# Altium PCB PCB1.PcbDoc
Units mm, origin at the board's own origin, x right, y up, seen from the top; angles counter-clockwise.
Board outline 80.14 x 99.59 mm, 2 copper layers (Top Layer, Bottom Layer); 42 components, 19 nets, 188 pads, 28 vias.
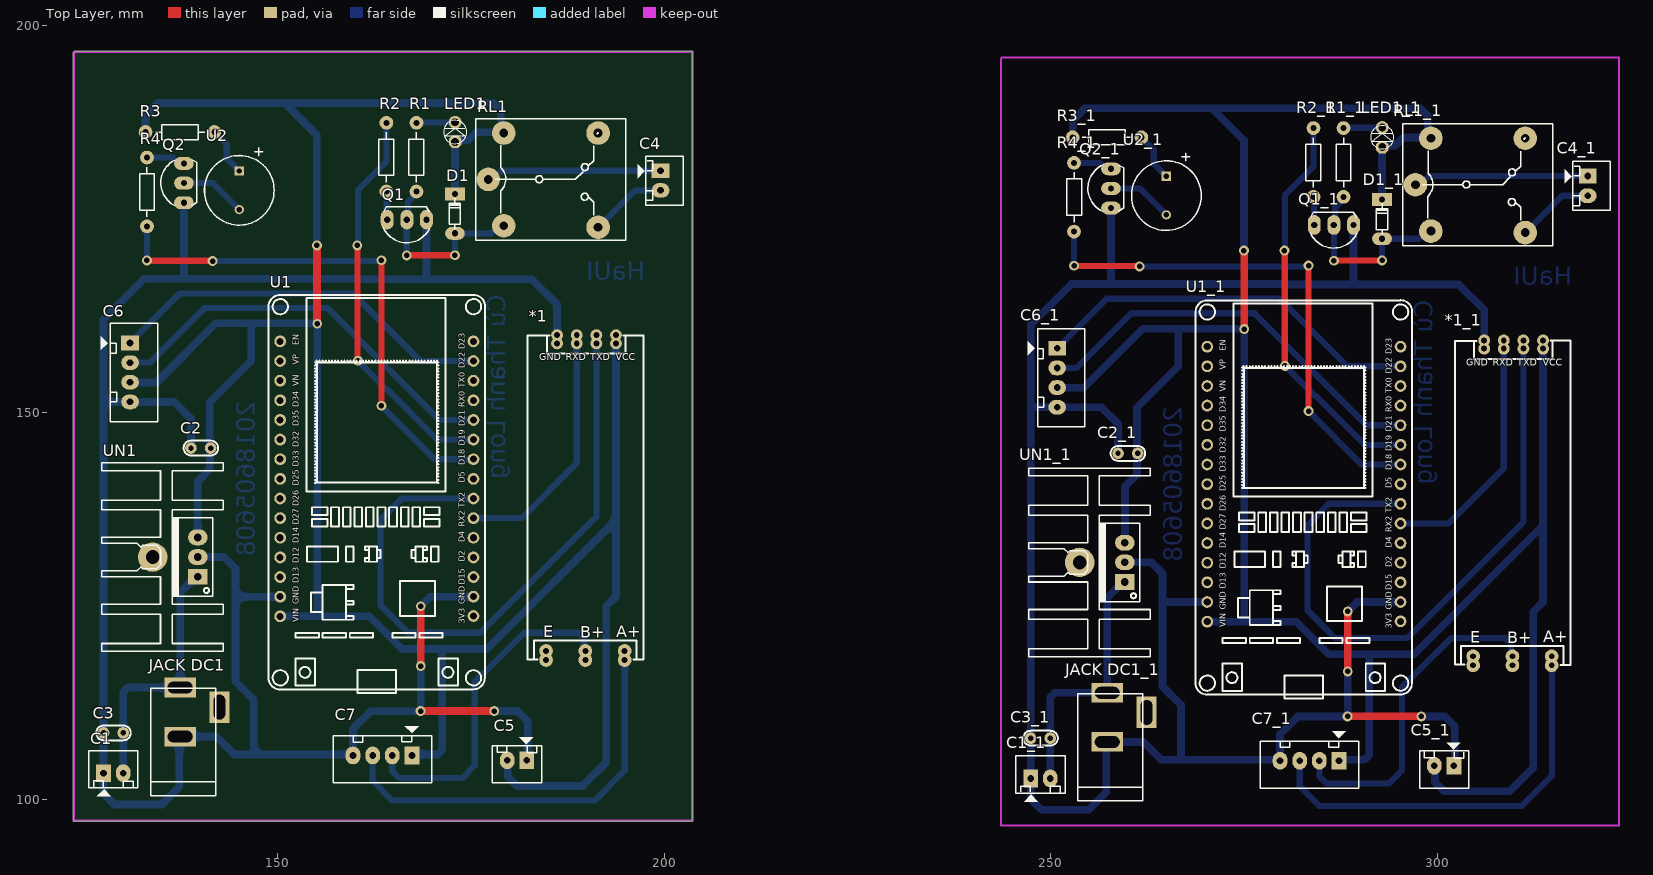
[diagram p0: Top Layer view]
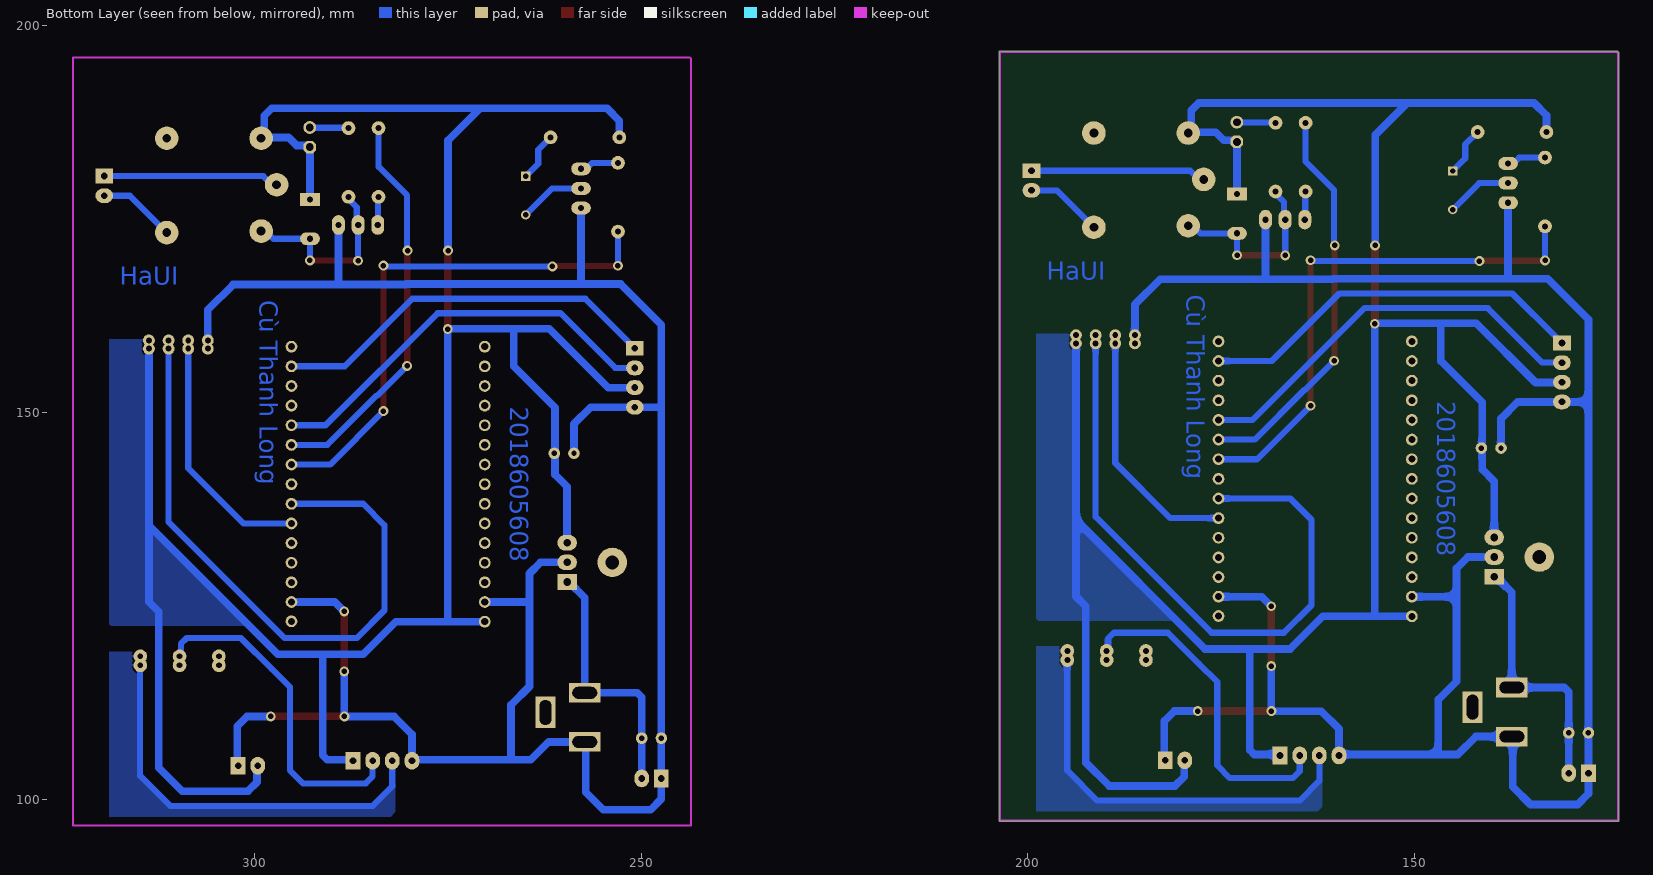
[diagram p1: Bottom Layer view, seen from below]

## Layer stack, top to bottom
Top Solder: solder mask 0.0102, Solder Resist, Dk 3.5
Top Layer: signal copper 0.0356
Dielectric 1: dielectric 0.32, FR-4, Dk 4.8
Bottom Layer: signal copper 0.0356
Bottom Solder: solder mask 0.0102, Solder Resist, Dk 3.5

## Board outline
123.571,97.282 ccw(c123.698,97.282) 123.698,97.155 203.581,97.155 ccw(c203.581,97.282) 203.708,97.282 203.708,196.621 ccw(c203.581,196.621) 203.581,196.749 123.825,196.749 ccw(c123.825,196.621) 123.734,196.711 123.608,196.584 ccw(c123.697,196.495) 123.571,196.494

## Design rules (kind name [scope] priority, off if disabled: settings)
Clearance [All] p1: gap=1 ignorepadtopadclearanceinfootprint=FALSE
PolygonConnect [All] p1: connectstyle=Relief reliefconductorwidth=0.254 reliefentries=4 polygonreliefangle="90 Angle" airgapwidth=0.254
RoutingVias [All] p1: holewidth=0.711 width=1.27 viastyle="Through Hole" minholewidth=0.711 minwidth=1.27 maxholewidth=0.711 maxwidth=1.27
SolderMaskExpansion [All] p1: expansion=0.102 istentingtop=FALSE
Width VCC5 [InNet('VCC5')] p1: maxlimit=1 minlimit=1 preferedwidth=1
Width VCC_IN [InNet('VCC_IN')] p2: maxlimit=1 minlimit=1 preferedwidth=1
Width VCC33 [InNet('VCC5')] p3: maxlimit=1 minlimit=1 preferedwidth=1
Width GND [InNet('GND')] p4: maxlimit=1 minlimit=1 preferedwidth=1
Width [All] p5: maxlimit=0.8 minlimit=0.8 preferedwidth=0.8
30 further rules are at their usual default settings.

## Classes and differential pairs
component class Sheet1: *1 C1 C2 C3 C7 D1 "JACK DC1" LED1 Q1 Q2 R1 R2 R3 R4 RL1 U1 U2 UN1

## Components (designator, comment, footprint, x,y, rotation, side; value= is the part's Value field where it differs from the comment)
*1 "TTL_RS485" "RS-485 Module" 189.497,136.906 r270 top
*1_1 "TTL_RS485" "RS-485 Module" 309.385,136.22 r270 top (schematic designator *1)
C1 "Header2" Header2 127.508,103.378 r0 top
C1_1 "Header2" Header2 247.396,102.692 r0 top (schematic designator C1)
C2 "104" "tu gom" 140.081,145.415 r180 top
C2_1 "104" "tu gom" 259.969,144.729 r180 top (schematic designator C2)
C3 "104" "tu gom" 128.778,108.585 r180 top
C3_1 "104" "tu gom" 248.666,107.899 r180 top (schematic designator C3)
C4 "Header2" Header2 199.542,181.28 r270 top
C4_1 "Header2" Header2 319.43,180.594 r270 top (schematic designator C4)
C5 "Header2" Header2 182.245,105.029 r180 top
C5_1 "Header2" Header2 302.133,104.343 r180 top (schematic designator C5)
C6 "LCD_I2C" Header4 130.937,159.004 r270 top
C6_1 "LCD_I2C" Header4 250.825,158.318 r270 top (schematic designator C6)
C7 "LCD_I2C" Header4 167.386,105.664 r180 top
C7_1 "LCD_I2C" Header4 287.274,104.978 r180 top (schematic designator C7)
D1 "100v" "DIODE 0.5A" 172.949,175.717 r270 top
D1_1 "100v" "DIODE 0.5A" 292.837,175.031 r270 top (schematic designator D1)
"JACK DC1" "JACK DC 5.5" "JACK DC 5.5" 139.954,111.277 r90 top value="Jac DC"
"JACK DC1_1" "JACK DC 5.5" "JACK DC 5.5" 259.842,110.592 r90 top value="Jac DC" (schematic designator "JACK DC1")
LED1 "LED 3mm" LED-3MM-BLUE 172.974,186.413 r90 top
LED1_1 "LED 3mm" LED-3MM-BLUE 292.862,185.727 r90 top (schematic designator LED1)
Q1 "C1815" C1815_cam 166.726,174.955 r180 top
Q1_1 "C1815" C1815_cam 286.614,174.269 r180 top (schematic designator Q1)
Q2 "C1815" C1815_cam 137.897,179.68 r90 top
Q2_1 "C1815" C1815_cam 257.785,178.994 r90 top (schematic designator Q2)
R1 "510R" R1/4W 167.97,187.477 r270 top value="R1/4W - 1K"
R1_1 "510R" R1/4W 287.858,186.792 r270 top value="R1/4W - 1K" (schematic designator R1)
R2 "510R" R1/4W 164.084,187.477 r270 top value="R1/4W - 1K"
R2_1 "510R" R1/4W 283.972,186.792 r270 top value="R1/4W - 1K" (schematic designator R2)
R3 "510R" R1/4W 132.944,186.284 r0 top value="R1/4W - 1K"
R3_1 "510R" R1/4W 252.832,185.598 r0 top value="R1/4W - 1K" (schematic designator R3)
R4 "510R" R1/4W 133.121,174.092 r90 top value="R1/4W - 1K"
R4_1 "510R" R1/4W 253.009,173.406 r90 top value="R1/4W - 1K" (schematic designator R4)
RL1 "Relay" RELAY_SRA_05VDC_SL_C 177.265,180.157 r0 top
RL1_1 "Relay" RELAY_SRA_05VDC_SL_C 297.153,179.471 r0 top (schematic designator RL1)
U1 "ESP32_MODULE copy" ESP32-WIFIMODULE-FOOTPRINT 164.973,139.7 r0 top
U1_1 "ESP32_MODULE copy" ESP32-WIFIMODULE-FOOTPRINT 284.861,139.014 r0 top (schematic designator U1)
U2 "BUZZ" BUZZER_D9_TH 145.059,177.749 r270 top
U2_1 "BUZZ" BUZZER_D9_TH 264.947,177.063 r270 top (schematic designator U2)
UN1 "L78M05CP" QTO-220H2 139.7,131.318 r90 top
UN1_1 "L78M05CP" QTO-220H2 259.588,130.632 r90 top (schematic designator UN1)

## Footprints (in the part's own frame and the unit in brackets; to place one, negate y for a bottom-side part, rotate by r counter-clockwise, add the part's x,y. Pads: shape width x height; smd on the part's side, far side on the other; paste and mask are expansions set on the pad)
BUZZER_D9_TH [mm]
  rect 1.2x1.2 hole 0.7: 1(-3.5,0)
  round 1.2 hole 0.7: 2(1.5,0)
  silkscreen extent -6.5,-4.5 3.5,4.5, body extent -5.5,-4.5 3.5,4.5, height 5.5
C1815_cam [mil]
  oval 66x100 hole 32: 1(-100,0) 2(0,0) 3(100,0)
  silkscreen extent -117,-65 120,118, body extent -109,-66 109,95, height 245
"DIODE 0.5A" [mil] "Diode muoi, xung"
  oval 65x100 hole 32: 1(100,0)
  rect 65x100 hole 32: 2(-100,0)
  silkscreen extent -80,-30 80,28, body extent -108,-33 108,32, height 61
ESP32-WIFIMODULE-FOOTPRINT [mil]
  round 60 hole 36: 1(-575.9,768.25) 2(-575.9,668.25) 3(-575.9,568.25) 4(-575.9,468.25) 5(-575.9,368.25) 6(-575.9,268.25) 7(-575.9,168.25) 8(-575.9,68.25) 9(-575.9,-31.75) 10(-575.9,-131.75) 11(-575.9,-231.75) 12(-575.9,-331.75) 13(-575.9,-431.75) 14(-575.9,-531.75) 15(-575.9,-631.75) 16(408.35,-630.18) 17(408.35,-531.75) 18(408.35,-431.75) 19(408.35,-331.75) 20(408.35,-231.75) 21(408.35,-131.75) 22(408.35,-31.75) 23(408.35,68.25) 24(408.35,168.25) 25(408.35,268.25) 26(408.35,368.25) 27(408.35,468.25) 28(408.35,568.25) 29(408.35,668.25) 30(408.35,768.25)
  silkscreen extent -635,-1023 468,1005
Header2 [mil] "CON2"
  rect 75x90 hole 34: 1(0,0)
  oval 75x90 hole 34: 2(100,0)
  silkscreen extent -75,-118 175,115, body extent -68,-70 168,107, height 236
Header4 [mil] "CON4"
  rect 75x90 hole 34: 1(0,0)
  oval 75x90 hole 34: 2(100,0) 3(200,0) 4(300,0)
  silkscreen extent -100,-150 400,140, body extent -90,-90 398,136, height 276
"JACK DC 5.5" [mm] "Jac DC input"
  rect 2.54x4.064 hole 1.5 slot 3.2 at 90 deg: 1(3.175,2.54) 2(-3.175,2.54)
  rect 4.064x2.54 hole 1.5 slot 3.2 at 0 deg: 3(0.635,-2.54)
  silkscreen extent -10.79,-2.03 3.05,6.35, body extent -10.42,-2.67 3.4,6.84, height 11.02
LED-3MM-BLUE [mil]
  oct 65x65 hole 40: 1(-55,0)
  round 65 hole 40: 2(45,0)
  silkscreen extent -64,-59 54,59, body extent -72,-65 54,65, height 184
QTO-220H2 [mil] "TO-220 - 1-2-3"
  round 150 hole 70: 0(0,230)
  rect 80x100 hole 39: 1(-100,0)
  oval 80x100 hole 39: 2(0,0) 3(100,0)
  silkscreen extent -480,-130 480,490, body extent -449,-177 453,469, height 1206
R1/4W [mil]
  round 70 hole 31: 1(0,0) 2(350,0)
  silkscreen extent 48,-38 302,38, body extent -40,-47 386,47, height 111
RELAY_SRA_05VDC_SL_C [mil] "Relay SPDT, 5 pin, 10A,W 650mil, L 800mil, H 800mil"
  round 120 hole 45: 1(559.06,-243.78) 2(559.06,236.22) 3(78.74,236.22) 4(0,0) 5(78.74,-236.22)
  silkscreen extent -63,-311 700,310, body extent -55,-306 697,304, height 602
"RS-485 Module" [mil] "RS-485 TTL Module"
  round 60 hole 30: 1(-910,168.5) 1(-868,168.5) 2(-910,68.5) 2(-868,68.5) 3(-910,-31.5) 3(-868,-31.5) 4(-910,-131.5) 4(-868,-131.5)
  round 70 hole 30: 5(698,-187.5) 5(744,-187.5) 6(698,12.5) 6(744,12.5) 7(698,212.5) 7(744,212.5)
  silkscreen extent -909,-281 742,308, body extent -949,-282 808,310, height 110
"tu gom" [mm] "Tu gom mini"
  round 1.5 hole 0.7: 1(-1.27,0) 2(1.27,0)
  silkscreen extent -2.25,-0.97 2.22,0.97, body extent -2.92,-0.85 2.92,0.85, height 6.12

## Part data
C1 C1_1 C4 C4_1 C5 C5_1: "Header IDC, 2 x 1 Pin Vertical 2.54mm Pitch (Non-Boxed, Male)", Manufacturer="W¨¹rth Elektronik eiSos GmbH", partNo=613002143121, ComponentLink1 Description=Manufacturer, ComponentLink1URL=http://www.we-online.com, ComponentLink2 Description=Datasheet, ComponentLink2URL=http://katalog.we-online.de/em/datasheet/6130xx143121.pdf, Created by="Karrer Zheng", Created Date="29 March 2013", NoPins=02
C2 C2_1 C3 C3_1: library part "Tu gom 104 50V", "Cắm", Chung_Loai=Cắm, Don_Vi=Con, Ma_Hang=MH004761, So_Chan=2, Ten_Linh_Kien="Tụ gốm 104 100nF 50V"
C6 C6_1 C7 C7_1: library part Header4, "Header IDC, 4 x 1 Pin Vertical 2.54mm Pitch (Non-Boxed, Male)", Manufacturer="W¨¹rth Elektronik eiSos GmbH", partNo=613002143121, ComponentLink1 Description=Manufacturer, ComponentLink1URL=http://www.we-online.com, ComponentLink2 Description=Datasheet, ComponentLink2URL=http://katalog.we-online.de/em/datasheet/6130xx143121.pdf, Created by="Karrer Zheng", Created Date="29 March 2013", NoPins=02
D1 D1_1: library part "Diode 1N4148", "Cắm", Chung_Loai=Cắm, Don_Vi=Con, Ma_Hang=MH001065, Ten_Linh_Kien="Diode 1N4148 DO35 450mA 100V ( 1N4148 DIP)"
LED1 LED1_1: library part "LED 3mm Xanh Duong", "Cắm", Chung_Loai=Cắm, Don_Vi=Con, Ma_Hang=MH009003, Ten_Linh_Kien="LED 3MM Xanh Dương SS (1000c)"
Q1 Q1_1 Q2 Q2_1: "NPN 600mW, ECB"
R1 R1_1 R2 R2_1 R3 R3_1 R4 R4_1: library part R1/4W, "Resistor 1/4W"
RL1 RL1_1: library part RL_SRA-05VDC-SL-C, "Relay 5 Chan", Ma_Hang=MH009374, Ten="Relay 5V10A SRD-05VDC-SL-C Chính Hãng"
U2 U2_1: library part Speaker, "Loudspeaker"
UN1 UN1_1: "Positive Voltage Regulator", ComponentLink1Description="Manufacturer Link", ComponentLink1URL=http://www.st.com/, ComponentLink2Description=Datasheet, ComponentLink2URL=http://www.st.com/stonline/products/literature/ds/2146/l78m05c.pdf, DatasheetVersion=Apr-1994, LatestRevisionDate=17-Jul-2002, LatestRevisionNote="Re-released for DXP Platform.", Note="Tab is connected to pin 3 (GND).", PackageDescription="TO, Thru-Hole, Vertical, Heatsink Mounted; 3 In-Line Leads; Pitch 2.54 mm; Pin sequence 1, 3, 2", PackageReference=ISOWATT220AB, PackageVersion=Jul-1998, Published=24-Aug-2001, Publisher="Altium Limited"

## Via types
v1: diameter 1.27, hole 0.711, Top Layer to Bottom Layer, 28 vias

## Nets (pads, with @x,y where several pads share a name; then routed paths per layer and width w, separated by ;. In a path a pad name is that pad's centre, name@x,y a point inside that pad or via, vN(x,y) a via of type N, cw(c..) or ccw(c..) an arc to the next point about the centre after c; other vN are vias at no path point)
GND: "JACK DC1.2" *1.4 C1.1 C2.2 C3.2 C5.1 C6.4 C7.4 Q1.1 Q2.1 U1.14 U1.17 UN1.2 | length 292.2
  Top Layer w1: v1(168.503,111.405) 168.506,111.402 178.031,111.402 v1(178.033,111.4) ; v1(168.529,117.221) v1(168.529,124.968)
  Bottom Layer w1: Q2.1 137.897,167.305 ; C2.2 138.811,149.225 136.652,151.384 C6.4 127.508,151.384 ; UN1.2 143.129,131.318 144.562,129.885 144.562,126.194 ; 146.939,105.791 159.639,105.791 C7.4 159.766,109.093 162.052,111.379 168.477,111.379 v1(168.503,111.405) 168.529,111.431 v1(168.529,117.221) ; U1.14 144.562,126.194 ; v1(168.529,124.968) 169.755,126.194 U1.17 ; Q1.1 169.266,167.246 ; v1(178.033,111.4) 181.081,111.4 182.372,110.109 182.372,105.156 C5.1 ; *1.4@186.157,160.02 186.157,163.982 182.893,167.246 169.266,167.246 ; 127.508,151.384 127.508,162.052 132.761,167.305 137.897,167.305 ; 127.508,151.384 C3.2 C1.1 127.508,100.711 128.905,99.314 135.001,99.314 137.287,101.6 137.287,107.975 137.414,108.102 142.088,108.102 144.407,105.783 146.939,105.783 146.939,112.891 144.562,115.268 144.562,126.194 ; 137.897,167.305 160.502,167.305 160.561,167.246 169.266,167.246
NetC4_1: C4.1 RL1.4 | length 22.7
  Bottom Layer w0.8: RL1.4 177.874,180.157 178.997,181.28 C4.1
NetC4_2: C4.2 RL1.1 | length 10.1
  Bottom Layer w0.8: RL1.1 196.24,178.74 C4.2
NetD1_1: D1.1 Q1.2 R1.2 RL1.5 | length 24.5
  Top Layer w0.8: v1(166.726,170.332) 166.738,170.345 172.936,170.345 v1(172.949,170.358)
  Bottom Layer w0.8: v1(166.726,170.332) Q1.2 166.893,175.123 166.893,177.246 167.97,178.323 R1.2 ; v1(172.949,170.358) D1.1 177.677,173.177 178.657,174.157 RL1.5
NetLED1_2: LED1.2 R1.1 | length 5
  Bottom Layer w0.8: R1.1 168.01,187.517 172.935,187.517 LED1.2
NetQ1_3: Q1.3 R2.2 | length 3.7
  Bottom Layer w0.8: R2.2 164.135,178.537 164.135,175.006 Q1.3
NetQ2_2: Q2.2 U2.2 | length 8.6
  Bottom Layer w0.8: Q2.2 141.629,179.68 U2.2
NetQ2_3: Q2.3 R4.2 | length 5.1
  Bottom Layer w0.8: R4.2 136.466,182.982 137.228,182.22 Q2.3
NetR3_2: R3.2 U2.1 | length 6.4
  Bottom Layer w0.8: R3.2 143.44,184.677 143.44,182.869 U2.1
OUT_BUZ: R4.1 U1.24 | length 68.4
  Top Layer w0.8: v1(133.121,169.672) 133.16,169.634 141.567,169.634 v1(141.605,169.596) ; v1(163.449,150.876) v1(163.449,169.697)
  Bottom Layer w0.8: v1(133.121,169.672) R4.1 ; v1(141.605,169.596) 163.22,169.596 163.322,169.697 v1(163.449,169.697) ; v1(163.449,150.876) 170.351,143.974 U1.24
OUT_RL1: R2.1 U1.25 | length 51.5
  Top Layer w0.8: v1(160.325,171.631) 160.363,171.593 160.363,156.756 v1(160.401,156.718)
  Bottom Layer w0.8: v1(160.325,171.631) 160.401,171.707 160.401,178.773 164.084,182.456 R2.1 ; v1(160.401,156.718) 164.208,152.911 164.292,152.911 170.689,146.514 U1.25
RS485_A+: *1.7 C7.3 | length 52.9
  Bottom Layer w0.8: C7.3 162.306,102.362 164.841,99.827 191.013,99.827 194.92,103.734 194.92,117.983 *1.7@194.894,118.008
RS485_B-: *1.6 C7.2 | length 45
  Bottom Layer w0.8: C7.2@164.846,106.254 164.846,103.632 165.735,102.743 173.863,102.743 175.514,104.394 175.514,115.185 177.872,117.544 177.889,117.544 181.884,121.539 188.874,121.539 189.645,120.768 189.645,119.346 189.814,119.177 *1.6@189.814,118.008
RX2: *1.3 U1.21 | length 31.8
  Bottom Layer w0.8: U1.21 181.566,136.354 188.697,143.485 *1.3@188.697,158.953
SCL: C6.1 U1.29 | length 50.8
  Bottom Layer w0.8: C6.1 131.127,159.004 131.68,159.556 131.68,159.747 137.338,165.405 159.715,165.405 168.446,156.674 U1.29
SDA: C6.2 U1.26 | length 53.3
  Bottom Layer w0.8: C6.2 133.477,156.464 140.538,163.525 152.842,163.525 152.863,163.546 156.451,163.546 170.943,149.054 U1.26
TX2: *1.2 U1.22 | length 82.2
  Bottom Layer w0.8: U1.22 166.072,138.894 163.322,136.144 163.322,125.095 166.886,121.531 176.241,121.531 191.237,136.528 *1.2@191.237,158.953
VCC5: *1.1 C2.1 C5.2 C6.3 C7.1 D1.2 LED1.1 R3.1 RL1.3 U1.15 UN1.3 | length 332.6
  Top Layer w1: v1(155.092,171.631) 155.118,171.605 155.118,161.519 v1(155.143,161.493)
  Bottom Layer w1: C6.3 130.968,153.893 134.36,153.893 142.011,161.544 146.612,161.544 ; R3.1 132.944,188.443 134.544,190.043 150.952,190.043 ; UN1.3 139.7,141.097 141.255,142.652 141.255,145.319 C2.1 141.255,145.511 141.255,151.327 146.612,156.684 146.612,161.544 ; U1.15 155.143,123.654 ; v1(155.092,171.631) 155.092,185.903 150.952,190.043 ; C7.1 167.711,105.664 167.838,105.791 170.727,105.791 171.313,106.377 171.313,119.327 171.196,119.444 ; D1.2 172.961,178.27 172.961,185.003 LED1.1 173.18,185.222 174.681,185.222 175.717,186.258 RL1.3@179.164,186.258 ; RL1.3 RL1.3@179.164,186.258 ; C5.2 179.792,104.942 179.792,102.91 180.975,101.727 189.484,101.727 192.505,104.748 192.505,124.941 193.777,126.213 193.777,136.119 ; *1.1@193.777,158.953 193.777,136.119 ; 146.612,161.544 155.092,161.544 v1(155.143,161.493) 155.143,123.654 ; 150.952,190.043 177.902,190.043 178.873,189.071 178.873,186.548 RL1.3@179.164,186.258 ; 155.143,123.654 161.842,123.654 166.053,119.444 171.196,119.444 ; 171.196,119.444 177.102,119.444 193.777,136.119
VCC_IN: "JACK DC1.1" C1.2 C3.1 UN1.1 | length 33
  Bottom Layer w1: C1.2 C3.1@130.048,108.107 ; C3.1 130.048,113.867 130.634,114.452 137.414,114.452 137.414,126.746 139.446,128.778 UN1.1
pads on no net: "JACK DC1.3" "JACK DC1_1.1" "JACK DC1_1.2" "JACK DC1_1.3" *1.5 *1_1.1 *1_1.2 *1_1.3 *1_1.4 *1_1.5 *1_1.6 *1_1.7 C1_1.1 C1_1.2 C2_1.1 C2_1.2 C3_1.1 C3_1.2 C4_1.1 C4_1.2 C5_1.1 C5_1.2 C6_1.1 C6_1.2 C6_1.3 C6_1.4 C7_1.1 C7_1.2 C7_1.3 C7_1.4 D1_1.1 D1_1.2 LED1_1.1 LED1_1.2 Q1_1.1 Q1_1.2 Q1_1.3 Q2_1.1 Q2_1.2 Q2_1.3 R1_1.1 R1_1.2 R2_1.1 R2_1.2 R3_1.1 R3_1.2 R4_1.1 R4_1.2 RL1.2 RL1_1.1 RL1_1.2 RL1_1.3 RL1_1.4 RL1_1.5 U1.1 U1.2 U1.3 U1.4 U1.5 U1.6 U1.7 U1.8 U1.9 U1.10 U1.11 U1.12 U1.13 U1.16 U1.18 U1.19 U1.20 U1.23 U1.27 U1.28 U1.30 U1_1.1 U1_1.2 U1_1.3 U1_1.4 U1_1.5 U1_1.6 U1_1.7 U1_1.8 U1_1.9 U1_1.10 U1_1.11 U1_1.12 U1_1.13 U1_1.14 U1_1.15 U1_1.16 U1_1.17 U1_1.18 U1_1.19 U1_1.20 U1_1.21 U1_1.22 U1_1.23 U1_1.24 U1_1.25 U1_1.26 U1_1.27 U1_1.28 U1_1.29 U1_1.30 U2_1.1 U2_1.2 UN1.0 UN1_1.0 UN1_1.1 UN1_1.2 UN1_1.3
copper on no net: | length 1179.9
  Top Layer w0.8: v1(253.009,168.986) 253.047,168.948 261.455,168.948 v1(261.493,168.91) ; v1(280.213,170.945) 280.251,170.907 280.251,156.07 v1(280.289,156.032) ; v1(283.337,150.19) v1(283.337,169.012) ; v1(286.614,169.647) 286.626,169.659 292.824,169.659 v1(292.837,169.672)
  Top Layer w1: v1(274.98,170.945) 275.006,170.92 275.006,160.833 v1(275.031,160.807) ; v1(288.391,110.719) 288.394,110.717 297.919,110.717 v1(297.921,110.714) ; v1(288.417,116.535) v1(288.417,124.282)
  Bottom Layer w0.8: 250.825,155.778 253.365,155.778 260.426,162.839 272.73,162.839 272.751,162.86 276.339,162.86 290.831,148.368 295.233,148.368 ; 250.825,158.318 251.016,158.318 251.568,158.871 251.568,159.061 257.226,164.719 279.603,164.719 288.334,155.988 295.233,155.988 ; v1(253.009,168.986) 253.009,173.406 ; 253.009,182.296 256.354,182.296 257.116,181.534 257.785,181.534 ; 257.785,178.994 261.517,178.994 264.947,175.563 ; v1(261.493,168.91) 283.108,168.91 283.21,169.012 v1(283.337,169.012) ; 261.722,185.598 263.328,183.991 263.328,182.183 264.947,180.563 ; v1(280.213,170.945) 280.289,171.021 280.289,178.087 283.972,181.77 283.972,186.792 ; v1(280.289,156.032) 284.096,152.225 284.18,152.225 290.577,145.828 295.233,145.828 ; 282.194,104.978 282.194,101.676 284.729,99.141 310.901,99.141 314.808,103.048 314.808,117.297 314.782,117.323 ; v1(283.337,150.19) 290.239,143.288 295.233,143.288 ; 283.972,177.902 284.023,177.851 284.023,174.32 284.074,174.269 ; 284.734,105.568 284.734,102.946 285.623,102.057 293.751,102.057 295.402,103.708 295.402,114.5 297.76,116.858 297.777,116.858 301.772,120.853 308.762,120.853 309.533,120.083 309.533,118.66 309.702,118.491 309.702,117.323 ; v1(286.614,169.647) 286.614,174.269 286.781,174.437 286.781,176.56 287.858,177.637 287.858,177.902 ; 287.858,186.792 287.898,186.831 292.823,186.831 292.862,186.87 ; v1(292.837,169.672) 292.837,172.491 297.565,172.491 298.545,173.471 299.153,173.471 ; 295.233,135.668 301.454,135.668 308.585,142.799 308.585,158.267 ; 295.233,138.208 285.96,138.208 283.21,135.458 283.21,124.409 286.774,120.846 296.129,120.846 311.125,135.842 311.125,158.267 ; 297.153,179.471 297.762,179.471 298.885,180.594 319.43,180.594 ; 311.353,173.279 316.128,178.054 319.43,178.054
  Bottom Layer w1: 249.936,102.692 249.936,107.421 ; 249.936,107.899 249.936,113.181 250.522,113.767 257.302,113.767 257.302,126.06 259.334,128.092 259.588,128.092 ; 250.825,153.238 250.856,153.207 254.248,153.207 261.899,160.858 266.5,160.858 ; 252.832,185.598 252.832,187.757 254.432,189.357 270.84,189.357 ; 257.785,176.454 257.785,166.619 ; 258.699,144.729 258.699,148.539 256.54,150.698 250.825,150.698 247.396,150.698 ; 259.588,130.632 263.017,130.632 264.45,129.2 264.45,125.508 ; 259.588,133.172 259.588,140.411 261.143,141.967 261.143,144.634 261.239,144.729 261.143,144.825 261.143,150.641 266.5,155.998 266.5,160.858 ; 266.827,105.105 279.527,105.105 279.654,104.978 279.654,108.407 281.94,110.693 288.365,110.693 v1(288.391,110.719) 288.417,110.745 v1(288.417,116.535) ; 270.233,122.968 275.031,122.968 ; 270.233,125.508 264.45,125.508 ; v1(274.98,170.945) 274.98,185.217 270.84,189.357 ; 287.274,104.978 287.599,104.978 287.726,105.105 290.615,105.105 291.201,105.691 291.201,118.641 291.084,118.758 ; v1(288.417,124.282) 289.643,125.508 295.233,125.508 ; 289.154,174.269 289.154,166.56 ; 292.837,177.571 292.849,177.584 292.849,184.318 292.862,184.33 293.068,184.536 294.569,184.536 295.605,185.572 299.052,185.572 ; v1(297.921,110.714) 300.969,110.714 302.26,109.423 302.26,104.47 302.133,104.343 ; 299.153,185.471 299.052,185.572 ; 299.593,104.343 299.68,104.256 299.68,102.224 300.863,101.041 309.372,101.041 312.393,104.062 312.393,124.255 313.665,125.527 313.665,135.433 ; 306.045,159.334 306.045,163.297 302.781,166.56 289.154,166.56 ; 313.665,158.267 313.665,135.433 ; 247.396,150.698 247.396,107.899 247.396,102.692 247.396,100.025 248.793,98.628 254.889,98.628 257.175,100.914 257.175,107.29 257.302,107.417 261.976,107.417 264.295,105.097 266.827,105.097 266.827,112.205 264.45,114.582 264.45,125.508 ; 247.396,150.698 247.396,161.366 252.649,166.619 257.785,166.619 ; 257.785,166.619 280.39,166.619 280.449,166.56 289.154,166.56 ; 266.5,160.858 274.98,160.858 v1(275.031,160.807) 275.031,122.968 ; 270.84,189.357 297.79,189.357 298.761,188.385 298.761,185.863 299.052,185.572 ; 275.031,122.968 281.73,122.968 285.941,118.758 291.084,118.758 ; 291.084,118.758 296.99,118.758 313.665,135.433

## Polygon pours and split planes (outlines as drawn)
no net on Bottom Layer "NONET_L02_P006" (solid, pour order 6): 281.788,98.374 282.423,97.739 319.964,97.739 319.964,119.075 315.366,119.075 314.782,118.491 314.808,118.466 314.808,103.048 310.901,99.141 284.729,99.141 281.788,102.083
no net on Bottom Layer "NONET_L02_P005" (solid, pour order 5): 313.665,159.487 319.888,159.487 319.888,123.749 318.567,122.428 305.613,122.428 300.634,122.428 313.639,135.433 313.665,135.433
RS485_A+ on Bottom Layer "RS485_A+_L02_P004" (solid, pour order 4): 161.9,99.06 162.535,98.425 200.076,98.425 200.076,119.761 195.478,119.761 194.894,119.177 194.92,119.151 194.92,103.734 191.013,99.827 164.841,99.827 161.9,102.768
VCC5 on Bottom Layer "VCC5_L02_P002" (solid, pour order 2): 193.777,160.172 200,160.172 200,124.435 198.679,123.114 185.725,123.114 180.746,123.114 193.751,136.119 193.777,136.119

## Keep-outs
Keep-Out Layer:
  lines w0.254: 123.698,97.282 123.698,196.494 123.825,196.621 203.581,196.621 203.581,97.282 123.698,97.282 ; 243.586,96.596 323.469,96.596 323.469,195.936 243.713,195.936 243.586,195.809 243.586,96.596

## Other copper
Bottom Layer:
  text "HaUI" at 197.561,166.414 h4
  text "HaUI" at 317.449,165.729 h4
  text "Cù Thanh Long" at 180.22,165.227 h4 r90
  text "Cù Thanh Long" at 300.108,164.541 h4 r90
  text "2018605608" at 147.805,151.46 h4 r90
  text "2018605608" at 267.693,150.774 h4 r90

## Text inside footprints (layer, text, board x,y; h text height)
*1: Top Overlay "E" at 184.379,120.929 h1.52; Top Overlay "B+" at 189.154,120.853 h1.52; Top Overlay "A+" at 193.827,120.98 h1.52; Top Overlay "GND" at 183.871,156.439 h1.52; Top Overlay "VCC" at 193.751,156.439 h1.52; Top Overlay "TXD" at 190.424,156.439 h1.52; Top Overlay "RXD" at 187.249,156.439 h1.52
*1_1: Top Overlay "RXD" at 307.137,155.753 h1.52; Top Overlay "TXD" at 310.312,155.753 h1.52; Top Overlay "VCC" at 313.639,155.753 h1.52; Top Overlay "GND" at 303.759,155.753 h1.52; Top Overlay "A+" at 313.715,120.294 h1.52; Top Overlay "B+" at 309.042,120.167 h1.52; Top Overlay "E" at 304.267,120.244 h1.52
U1: Top Overlay "VIN" at 152.72,122.913 h0.75 r90; Top Overlay "GND" at 152.72,125.213 h0.75 r90; Top Overlay "D13" at 152.72,127.913 h0.75 r90; Top Overlay "D12" at 152.72,130.513 h0.75 r90; Top Overlay "D14" at 152.72,133.114 h0.75 r90; Top Overlay "D27" at 152.72,135.514 h0.75 r90; Top Overlay "D26" at 152.72,137.913 h0.75 r90; Top Overlay "D25" at 152.72,140.514 h0.75 r90; Top Overlay "D33" at 152.72,143.013 h0.75 r90; Top Overlay "D32" at 152.72,145.514 h0.75 r90; Top Overlay "D35" at 152.72,148.214 h0.75 r90; Top Overlay "D34" at 152.72,150.713 h0.75 r90; Top Overlay "VN" at 152.72,153.413 h0.75 r90; Top Overlay "VP" at 152.72,156.214 h0.75 r90; Top Overlay "EN" at 152.72,158.713 h0.75 r90; Top Overlay "3V3" at 174.22,122.714 h0.75 r90; Top Overlay "GND" at 174.22,125.213 h0.75 r90; Top Overlay "D15" at 174.22,127.714 h0.75 r90; Top Overlay "D2" at 174.22,130.714 h0.75 r90; Top Overlay "D4" at 174.22,133.213 h0.75 r90; Top Overlay "RX2" at 174.22,135.213 h0.75 r90; Top Overlay "TX2" at 174.22,137.714 h0.75 r90; Top Overlay "D5" at 174.22,140.913 h0.75 r90; Top Overlay "D18" at 174.22,143.213 h0.75 r90; Top Overlay "D19" at 174.22,145.713 h0.75 r90; Top Overlay "D21" at 174.22,148.214 h0.75 r90; Top Overlay "RX0" at 174.22,150.713 h0.75 r90; Top Overlay "TX0" at 174.22,153.214 h0.75 r90; Top Overlay "D22" at 174.22,155.713 h0.75 r90; Top Overlay "D23" at 174.22,158.214 h0.75 r90
U1_1: Top Overlay "D23" at 294.108,157.528 h0.75 r90; Top Overlay "D22" at 294.108,155.028 h0.75 r90; Top Overlay "TX0" at 294.108,152.528 h0.75 r90; Top Overlay "RX0" at 294.108,150.028 h0.75 r90; Top Overlay "D21" at 294.108,147.528 h0.75 r90; Top Overlay "D19" at 294.108,145.028 h0.75 r90; Top Overlay "D18" at 294.108,142.528 h0.75 r90; Top Overlay "D5" at 294.108,140.228 h0.75 r90; Top Overlay "TX2" at 294.108,137.028 h0.75 r90; Top Overlay "RX2" at 294.108,134.528 h0.75 r90; Top Overlay "D4" at 294.108,132.528 h0.75 r90; Top Overlay "D2" at 294.108,130.028 h0.75 r90; Top Overlay "D15" at 294.108,127.028 h0.75 r90; Top Overlay "GND" at 294.108,124.528 h0.75 r90; Top Overlay "3V3" at 294.108,122.028 h0.75 r90; Top Overlay "EN" at 272.608,158.028 h0.75 r90; Top Overlay "VP" at 272.608,155.528 h0.75 r90; Top Overlay "VN" at 272.608,152.728 h0.75 r90; Top Overlay "D34" at 272.608,150.028 h0.75 r90; Top Overlay "D35" at 272.608,147.528 h0.75 r90; Top Overlay "D32" at 272.608,144.828 h0.75 r90; Top Overlay "D33" at 272.608,142.328 h0.75 r90; Top Overlay "D25" at 272.608,139.828 h0.75 r90; Top Overlay "D26" at 272.608,137.228 h0.75 r90; Top Overlay "D27" at 272.608,134.828 h0.75 r90; Top Overlay "D14" at 272.608,132.428 h0.75 r90; Top Overlay "D12" at 272.608,129.828 h0.75 r90; Top Overlay "D13" at 272.608,127.228 h0.75 r90; Top Overlay "GND" at 272.608,124.528 h0.75 r90; Top Overlay "VIN" at 272.608,122.228 h0.75 r90